# EAGLE board combine (EAGLE 5.10)
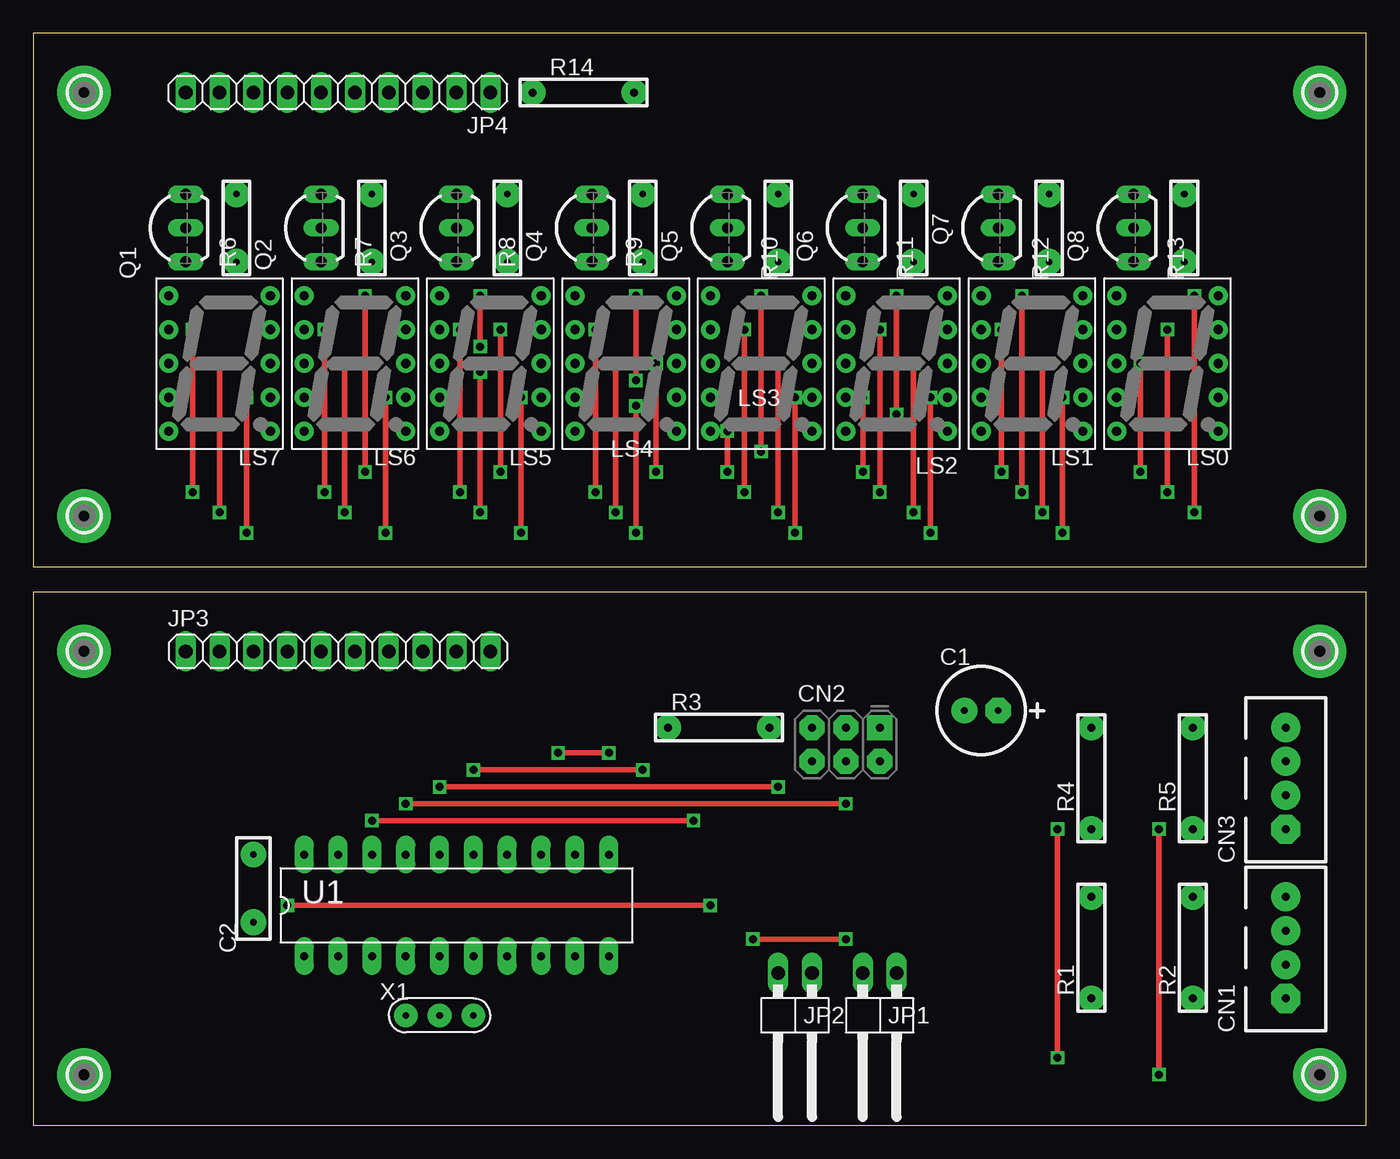
[diagram p0: board, top side]
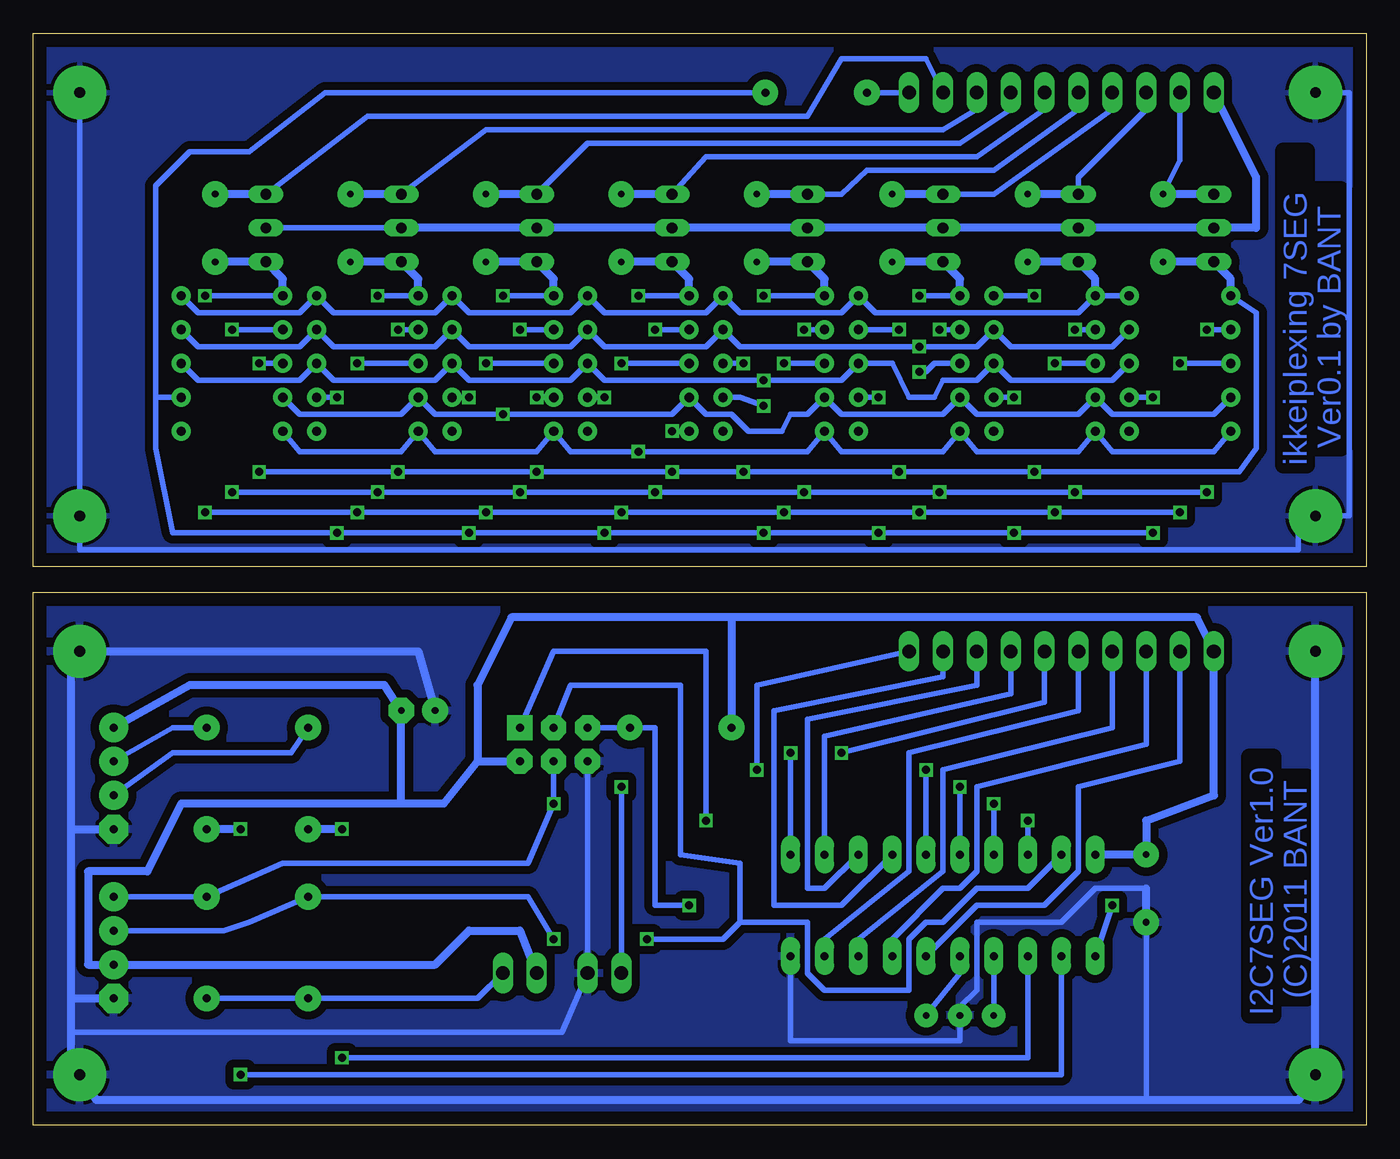
[diagram p1: board, bottom side, seen from below]

Size 100 x 81.91 mm. Coordinates in mm from the lower left corner, seen from the top.
Outline: 0,0 100,0 100,40 0,40 0,0
Outline: 0,41.91 100,41.91 100,81.91 0,81.91 0,41.91
Copper layers (1*16): Top 0.035mm / dielectric 1.5mm / Bottom 0.035mm
Design rules "default": minimum track width 10mil, minimum drill 24mil, track to track 8mil, track to pad 8mil, pad to pad 8mil, via to via 8mil, smd to smd 8mil, copper to edge 40mil, drill to drill 8mil, minimum pad ring 10mil, minimum via ring 8mil, stop-mask expansion 4mil, vias tented up to drill 0mil, thermal gap 10mil

## Footprints (pad centres in the part's own frame; a part is rotated, then mirrored left to right if it is on the bottom)
CCAP_6.5 = drill 0.5 pad 1.93 octagon: + -1.27,0 | drill 0.5 pad 1.93 round: - 1.27,0
CAP_DIP_2 = drill 0.5 pad 1.93 round: 1 -2.54,0; 2 2.54,0
CON_HRS_DIP_4 = drill 0.6 pad 2.184 octagon: 1 -3.81,0 | drill 0.6 pad 2.184 round: 2 -1.27,0; 3 1.27,0; 4 3.81,0
2X3-NS = drill 0.6 pad 1.88 square: 1 -2.54,-1.27 | drill 0.6 pad 1.88 octagon: 2 -2.54,1.27; 3 0,-1.27; 4 0,1.27; 5 2.54,-1.27; 6 2.54,1.27
1X02/90 = drill 1.016 long: 1 -2.54,-3.81; 2 0,-3.81
1X10 = drill 1.016 long: 1 -11.43,0; 2 -8.89,0; 3 -6.35,0; 4 -3.81,0; 5 -1.27,0; 6 1.27,0; 7 3.81,0; 8 6.35,0; 9 8.89,0; 10 11.43,0
7SEG-10 = drill 0.7 pad 1.422 round: 1 -3.81,5.08; 2 -3.81,2.54; 3 -3.81,0; 4 -3.81,-2.54; 5 -3.81,-5.08; 6 3.81,-5.08; 7 3.81,-2.54; 8 3.81,0; 9 3.81,2.54; 10 3.81,5.08
PAD-2.1 = drill 0.8 pad 4 round: B2,1 0,0
TO92 = drill 0.813 long: B 2.54,0; C 0,0; E -2.54,0
R_0.125W_3 = drill 0.6 pad 1.93 round: 1 -3.81,0; 2 3.81,0
R_0.125W_2 = drill 0.5 pad 1.93 round: 1 -2.54,0; 2 2.54,0
DIL20 = drill 0.6 pad 1.422 long: 1 -11.43,-3.81; 2 -8.89,-3.81; 3 -6.35,-3.81; 4 -3.81,-3.81; 5 -1.27,-3.81; 6 1.27,-3.81; 7 3.81,-3.81; 8 6.35,-3.81; 9 8.89,-3.81; 10 11.43,-3.81; 11 11.43,3.81; 12 8.89,3.81; 13 6.35,3.81; 14 3.81,3.81; 15 1.27,3.81; 16 -1.27,3.81; 17 -3.81,3.81; 18 -6.35,3.81; 19 -8.89,3.81; 20 -11.43,3.81
CSTLS = drill 0.5 pad 1.778 round: 1 -2.54,0; 2 0,0; 3 2.54,0

## Placement (x,y rotation side)
C1  10uF  [CCAP_6.5]  71.12,31.11 180 top
C2  0.1uF  [CAP_DIP_2]  16.51,17.78 90 top
CN1  I2C  [CON_HRS_DIP_4]  93.98,13.34 90 top
CN2  AVR-ISP-6NS  [2X3-NS]  60.96,28.57 180 top
CN3  TTL  [CON_HRS_DIP_4]  93.98,26.04 90 top
JP1  [1X02/90]  62.23,7.62 180 top
JP2  [1X02/90]  55.88,7.62 180 top
JP3  [1X10]  22.86,35.56 0 top
JP4  [1X10]  22.86,77.47 180 top
LS0  [7SEG-10]  85.09,57.15 0 top
LS1  [7SEG-10]  74.93,57.15 0 top
LS2  [7SEG-10]  64.77,57.15 0 top
LS3  [7SEG-10]  54.61,57.15 0 top
LS4  [7SEG-10]  44.45,57.15 0 top
LS5  [7SEG-10]  34.29,57.15 0 top
LS6  [7SEG-10]  24.13,57.15 0 top
LS7  [7SEG-10]  13.97,57.15 0 top
MT1  MOUNT-PAD2.1  [PAD-2.1]  96.52,35.56 0 top
MT2  MOUNT-PAD2.1  [PAD-2.1]  96.52,3.81 0 top
MT3  MOUNT-PAD2.1  [PAD-2.1]  3.81,3.81 90 top
MT4  MOUNT-PAD2.1  [PAD-2.1]  3.81,35.56 0 top
MT5  MOUNT-PAD2.1  [PAD-2.1]  3.81,77.47 0 top
MT6  MOUNT-PAD2.1  [PAD-2.1]  3.81,45.72 0 top
MT7  MOUNT-PAD2.1  [PAD-2.1]  96.52,45.72 0 top
MT8  MOUNT-PAD2.1  [PAD-2.1]  96.52,77.47 0 top
Q1  2SC1815  [TO92]  11.43,67.31 90 top
Q2  2SC1815  [TO92]  21.59,67.31 90 top
Q3  2SC1815  [TO92]  31.75,67.31 90 top
Q4  2SC1815  [TO92]  41.91,67.31 90 top
Q5  2SC1815  [TO92]  52.07,67.31 90 top
Q6  2SC1815  [TO92]  62.23,67.31 90 top
Q7  2SC1815  [TO92]  72.39,67.31 90 top
Q8  2SC1815  [TO92]  82.55,67.31 90 top
R1  10K  [R_0.125W_3]  79.38,13.34 270 top
R2  10K  [R_0.125W_3]  87,13.34 270 top
R3  10K  [R_0.125W_3]  51.44,29.84 180 top
R4  1K  [R_0.125W_3]  79.38,26.04 90 top
R5  1K  [R_0.125W_3]  87,26.04 90 top
R6  100  [R_0.125W_2]  15.24,67.31 270 top
R7  100  [R_0.125W_2]  25.4,67.31 270 top
R8  100  [R_0.125W_2]  35.56,67.31 270 top
R9  100  [R_0.125W_2]  45.72,67.31 270 top
R10  100  [R_0.125W_2]  55.88,67.31 270 top
R11  100  [R_0.125W_2]  66.04,67.31 270 top
R12  100  [R_0.125W_2]  76.2,67.31 270 top
R13  100  [R_0.125W_2]  86.36,67.31 270 top
R14  100  [R_0.125W_3]  41.27,77.47 0 top
U1  ATTINY2313  [DIL20]  31.75,16.51 0 top
X1  8MHz  [CSTLS]  30.48,8.26 180 top

## Library data of the parts
C1 C2 CN1 CN3 MT1-MT8 R1-R14 X1 = MyLib
CN2 U1 = atmel
JP1-JP4 = pinheader
LS0 LS1-LS7 = 7seg_led
Q1-Q8 = bant

## Nets
GND: C1.- C2.1 CN1.1 CN2.6 CN3.1 JP2.1 MT1.B2,1 MT2.B2,1 MT3.B2,1 MT4.B2,1 U1.10 X1.2
GND1: MT5.B2,1 MT6.B2,1 MT7.B2,1 MT8.B2,1
LINE2: JP4.9 Q1.B R6.1
LINE3: JP4.8 Q2.B R7.1
LINE4: JP4.7 Q3.B R8.1
LINE5: JP4.6 Q4.B R9.1
LINE6: JP4.5 Q5.B R10.1
LINE7: JP4.4 Q6.B R11.1
LINE8: JP4.3 Q7.B R12.1
LINE9: JP4.2 Q8.B R13.1
LINE10: JP4.1 R14.1
N$1: CN3.2 R4.2
N$2: CN3.3 R5.2
N$3: JP3.2 U1.6
N$4: JP3.3 U1.7
N$5: JP3.4 U1.8
N$6: JP3.5 U1.9
N$7: JP3.6 U1.11
N$8: CN2.5 R3.1 U1.1
N$9: CN1.3 CN2.3 R1.1 U1.19
N$10: CN1.4 CN2.4 R2.1 U1.17
N$11: JP1.1 R1.2 R2.2
N$12: JP3.7 U1.12
N$13: R4.1 U1.3
N$14: R5.1 U1.2
N$15: CN2.1 U1.18
N$16: JP2.2 U1.16
N$17: U1.4 X1.3
N$18: U1.5 X1.1
N$19: JP3.8 U1.13
N$20: JP3.9 U1.14
N$21: JP3.10 U1.15
N$22: LS0.3 LS1.2 LS2.4 LS3.5 LS4.8 LS5.9 LS6.10 LS7.1 Q1.E R6.2
N$23: LS0.2 LS1.1 LS2.2 LS3.2 LS4.2 LS5.2 LS6.2 LS7.2 Q7.E R12.2
N$24: LS0.10 LS1.10 LS2.10 LS3.10 LS4.10 LS5.10 LS6.1 LS7.10 Q2.E R7.2
N$25: LS0.4 LS1.4 LS2.1 LS3.4 LS4.4 LS5.4 LS6.4 LS7.4 Q6.E R11.2
N$26: LS0.5 LS1.5 LS2.5 LS3.1 LS4.5 LS5.5 LS6.5 LS7.5 Q5.E R10.2
N$27: LS0.8 LS1.8 LS2.8 LS3.8 LS4.1 LS5.8 LS6.8 LS7.8 Q4.E R9.2
N$28: LS0.9 LS1.9 LS2.9 LS3.9 LS4.9 LS5.1 LS6.9 LS7.9 Q3.E R8.2
N$32: LS0.7 LS1.7 LS2.7 LS3.7 LS4.7 LS5.7 LS6.7 LS7.7 R14.2
N$34: LS0.1 LS1.3 LS2.3 LS3.3 LS4.3 LS5.3 LS6.3 LS7.3 Q8.E R13.2
VCC: C1.+ C2.2 CN1.2 CN2.2 CN3.4 JP1.2 JP3.1 R3.2 U1.20
VCC1: JP4.10 Q1.C Q2.C Q3.C Q4.C Q5.C Q6.C Q7.C Q8.C

## Tracks (layer width: path | path; a pad name or v marks a point on that pad's centre or on a via)
GND
  Bottom 0.406: CN2.6 JP2.1 60.33,6.99 97.16,6.99 | U1.10 43.18,6.35 30.48,6.35 X1.2 30.48,8.89 29.21,10.16 29.21,15.24 22.86,15.24 20.32,17.78 16.51,17.78 | 97.16,4.45 96.52,4.45 MT2.B2,1 | 16.51,1.91 C2.1
  Bottom 0.61: C2.1 16.51,17.78 | MT2.B2,1 95.25,1.91 16.51,1.91 5.08,1.91 MT3.B2,1 MT4.B2,1 | 97.16,4.45 97.16,6.99 97.16,9.53 | 97.16,9.53 97.16,22.23 | 97.16,22.23 97.16,35.56 MT1.B2,1 71.12,35.56 C1.- | 97.16,9.53 CN1.1 | 97.16,22.23 CN3.1
  pour Bottom (isolate 0.61): 0,39.37 0,0 100.33,0 100.33,40.64 0,40.64
GND1
  Bottom 0.406: MT8.B2,1 MT7.B2,1 96.52,43.18 5.08,43.18 5.08,45.72 MT6.B2,1 1.27,45.72 1.27,77.47 MT5.B2,1
  pour Bottom (isolate 0.61): 0,82.55 0,41.91 100.33,41.91 100.33,82.55
LINE2
  Bottom 0.406: JP4.9 13.97,72.39 R6.1
  Bottom 0.61: Q1.B R6.1
LINE3
  Bottom 0.406: JP4.8 16.51,76.2 21.59,71.12 Q2.B
  Bottom 0.61: Q2.B R7.1
LINE4
  Bottom 0.406: Q3.B 27.94,69.85 19.05,76.2 JP4.7
  Bottom 0.61: Q3.B R8.1
LINE5
  Bottom 0.406: Q4.B 39.37,69.85 37.47,71.63 27.94,71.63 21.59,76.2 JP4.6
  Bottom 0.61: Q4.B R9.1
LINE6
  Bottom 0.406: Q5.B 49.53,72.64 29.21,72.64 24.13,76.2 JP4.5
  Bottom 0.61: Q5.B R10.1
LINE7
  Bottom 0.406: Q6.B 58.42,73.66 30.48,73.66 26.67,76.2 JP4.4
  Bottom 0.61: Q6.B R11.1
LINE8
  Bottom 0.406: Q7.B 66.04,74.68 31.75,74.68 29.21,76.2 JP4.3
  Bottom 0.61: Q7.B R12.1
LINE9
  Bottom 0.406: Q8.B 74.93,75.69 41.91,75.69 39.37,80.01 33.02,80.01 JP4.2
  Bottom 0.61: Q8.B R13.1
LINE10
  Bottom 0.406: JP4.1 R14.1
N$1
  Bottom 0.406: R4.2 80.64,27.94 89.53,27.94 CN3.2
N$2
  Bottom 0.406: R5.2 89.53,29.84 CN3.3
N$3
  Bottom 0.406: U1.6 29.21,16.51 24.13,16.51 21.59,19.05 21.59,25.4 13.97,27.3 JP3.2
N$4
  Bottom 0.406: U1.7 35.56,13.97 31.75,17.78 30.48,17.78 29.21,19.05 29.21,25.4 16.51,28.57 JP3.3
N$5
  Bottom 0.406: U1.8 38.1,13.97 31.75,19.05 31.75,26.67 19.05,29.84 JP3.4
N$6
  Bottom 0.406: U1.9 40.64,13.97 34.29,19.05 34.29,27.94 21.59,31.11 JP3.5
N$7  (via drill 0.6)
  Top 0.406: v39.37,27.94 v43.18,27.94
  Bottom 0.406: JP3.6 24.13,31.75 v39.37,27.94 | v43.18,27.94 U1.11
N$8  (via drill 0.6)
  Top 0.406: v19.05,16.51 v50.8,16.51
  Bottom 0.406: CN2.5 R3.1 53.34,29.84 53.34,16.51 v50.8,16.51 | U1.1 v19.05,16.51
N$9  (via drill 0.6)
  Top 0.406: v53.98,13.97 v60.96,13.97
  Bottom 0.254: CN2.3 60.96,29.21
  Bottom 0.406: CN1.3 85.72,14.61 83.82,15.24 R1.1 62.87,17.14 v60.96,13.97 | U1.19 25.4,17.78 29.21,17.78 31.75,15.24 33.02,15.24 34.29,13.97 34.29,10.16 40.64,10.16 41.91,11.43 41.91,15.24 46.99,15.24 | 46.99,15.24 48.26,13.97 v53.98,13.97 | CN2.3 59.69,33.02 51.44,33.02 51.44,20.32 46.99,19.68 46.99,15.24
N$10  (via drill 0.6)
  Top 0.406: v27.94,24.13 v60.96,24.13
  Bottom 0.406: CN2.4 v60.96,24.13 62.87,19.68 81.28,19.68 R2.1 | R2.1 86.36,17.14 | R2.1 CN1.4 | U1.17 v27.94,24.13
N$11
  Bottom 0.406: JP1.1 66.67,9.53 R1.2 R2.2
N$12
  Bottom 0.406: U1.12 40.64,29.21 26.67,32.38 JP3.7
N$13  (via drill 0.6)
  Top 0.406: v76.83,5.08 v76.83,22.23
  Bottom 0.406: U1.3 25.4,5.08 v76.83,5.08
  Bottom 0.61: v76.83,22.23 R4.1
N$14  (via drill 0.6)
  Top 0.406: v84.45,3.81 v84.45,22.23
  Bottom 0.406: U1.2 22.86,3.81 v84.45,3.81
  Bottom 0.61: v84.45,22.23 R5.1
N$15  (via drill 0.6)
  Top 0.406: v25.4,22.86 v49.53,22.86
  Bottom 0.406: CN2.1 60.96,35.56 49.53,35.56 v49.53,22.86 | U1.18 v25.4,22.86
N$16  (via drill 0.6)
  Top 0.406: v30.48,25.4 v55.88,25.4
  Bottom 0.406: U1.16 v30.48,25.4 | v55.88,25.4 JP2.2
N$17
  Bottom 0.406: X1.3 U1.4
N$18
  Bottom 0.406: X1.1 30.48,11.43 U1.5
N$19
  Bottom 0.406: U1.13 40.64,17.78 41.91,17.78 41.91,30.48 29.21,33.02 JP3.8
N$20
  Bottom 0.406: U1.14 39.37,16.51 44.45,16.51 44.45,31.11 31.75,33.66 JP3.9
N$21  (via drill 0.6)
  Top 0.406: v33.02,26.67 v45.72,26.67
  Bottom 0.406: JP3.10 45.72,33.02 v45.72,26.67 | U1.15 v33.02,26.67
N$22  (via drill 0.6)
  Top 0.406: v83.06,49.02 v83.06,57.15 | v24.89,49.02 v24.89,62.23 | v35.05,49.02 v35.05,59.69 | v46.74,49.02 v46.74,57.15 | v52.07,49.02 v52.07,52.07 | v62.23,49.02 v62.23,54.61 | v72.64,49.02 v72.64,59.69
  Bottom 0.406: v83.06,49.02 v72.64,49.02 v62.23,49.02 v52.07,49.02 v46.74,49.02 v35.05,49.02 v24.89,49.02 9.53,49.02 8.26,50.8 8.26,60.96 LS7.1 | v83.06,57.15 LS0.3 | v24.89,62.23 LS6.10 | v35.05,59.69 LS5.9 | v46.74,57.15 LS4.8 | v52.07,52.07 LS3.5 | v62.23,54.61 LS2.4 | v72.64,59.69 LS1.2
  Bottom 0.61: LS7.1 10.16,63.5 Q1.E R6.2
N$23  (via drill 0.6)
  Top 0.406: v85.09,47.5 v85.09,59.69 | v11.94,47.5 v11.94,59.69 | v21.84,47.5 v21.84,59.69 | v32,47.5 v32,59.69 | v42.16,47.5 v42.16,59.69 | v63.5,47.5 v63.5,59.69 | v74.17,47.5 v74.17,62.23 | v53.34,47.5 v53.34,59.69
  Bottom 0.406: v85.09,59.69 LS0.2 | v11.94,47.5 v21.84,47.5 v32,47.5 v42.16,47.5 v53.34,47.5 v63.5,47.5 v74.17,47.5 v85.09,47.5 | v11.94,59.69 LS7.2 | v21.84,59.69 LS6.2 | v32,59.69 LS5.2 | v42.16,59.69 LS4.2 | v63.5,59.69 LS2.2 | v74.17,62.23 LS1.1 | v53.34,59.69 LS3.2
  Bottom 0.61: LS1.1 71.12,63.5 Q7.E R12.2
N$24
  Bottom 0.406: LS7.10 LS6.1 21.59,60.96 36.83,60.96 LS5.10 39.37,60.96 46.99,60.96 LS4.10 49.53,60.96 57.15,60.96 LS3.10 59.69,60.96 67.31,60.96 LS2.10 69.85,60.96 77.47,60.96 LS1.10 80.01,60.96 87.63,60.96 LS0.10
  Bottom 0.61: LS6.1 20.32,63.5 Q2.E R7.2
N$25  (via drill 0.6)
  Top 0.406: v64.77,53.34 v64.77,62.23
  Bottom 0.406: LS7.4 11.43,53.34 19.05,53.34 LS6.4 21.59,53.34 29.21,53.34 LS5.4 31.75,53.34 39.37,53.34 LS4.4 41.91,53.34 43.18,53.34 43.81,52.07 46.35,52.07 47.62,53.34 49.53,53.34 LS3.4 52.07,53.34 v64.77,53.34 69.85,53.34 LS1.4 72.39,53.34 80.01,53.34 LS0.4 | v64.77,62.23 LS2.1
  Bottom 0.61: LS2.1 60.96,63.5 Q6.E R11.2
N$26  (via drill 0.6)
  Top 0.406: v54.61,50.55 v54.61,62.23
  Bottom 0.406: LS7.5 11.43,50.55 19.05,50.55 LS6.5 21.59,50.55 29.21,50.55 LS5.5 31.75,50.55 39.37,50.55 LS4.5 41.91,50.55 v54.61,50.55 59.69,50.55 LS2.5 62.23,50.55 69.85,50.55 LS1.5 72.39,50.55 80.01,50.55 LS0.5 | v54.61,62.23 LS3.1
  Bottom 0.61: LS3.1 50.8,63.5 Q5.E R10.2
N$27  (via drill 0.6)
  Top 0.406: v45.21,55.88 v45.21,62.23
  Bottom 0.406: LS7.8 19.05,55.88 26.67,55.88 LS6.8 29.21,55.88 31.75,55.88 32.38,54.61 34.29,54.61 35.56,57.15 LS5.8 39.37,55.88 v45.21,55.88 57.15,55.88 LS3.8 59.69,55.88 67.31,55.88 LS2.8 69.85,55.88 77.47,55.88 LS1.8 80.01,55.88 87.63,55.88 LS0.8 | v45.21,62.23 LS4.1
  Bottom 0.61: LS4.1 40.64,63.5 Q4.E R9.2
N$28  (via drill 0.6)
  Top 0.406: v33.53,58.42 v33.53,62.23
  Bottom 0.406: LS7.9 19.05,58.42 26.67,58.42 LS6.9 29.21,58.42 v33.53,58.42 46.99,58.42 LS4.9 49.53,58.42 57.15,58.42 LS3.9 59.69,58.42 67.31,58.42 LS2.9 69.85,58.42 77.47,58.42 LS1.9 80.01,58.42 87.63,58.42 LS0.9 | v33.53,62.23 LS5.1
  Bottom 0.61: LS5.1 30.48,63.5 Q3.E R8.2
N$32  (via drill 0.6)
  Top 0.406: v16,44.45 v16,54.61 | v26.42,44.45 v26.42,54.61 | v36.58,44.45 v36.58,54.61 | v45.21,44.45 v45.21,53.98 | v77.22,44.45 v77.22,54.61 | v67.31,44.45 v67.31,54.61 | v57.15,44.45 v57.15,54.61
  Bottom 0.406: v16,54.61 LS7.7 | v16,44.45 v26.42,44.45 v36.58,44.45 v45.21,44.45 v57.15,44.45 v67.31,44.45 v77.22,44.45 89.53,44.45 90.81,50.8 90.81,54.61 | 90.81,54.61 LS0.7 | v26.42,54.61 LS6.7 | v36.58,54.61 LS5.7 | v45.21,53.98 46.99,54.61 LS4.7 | v77.22,54.61 LS1.7 | v67.31,54.61 LS2.7 | v57.15,54.61 LS3.7 | R14.2 78.11,77.47 83.82,73.03 88.27,73.03 90.81,70.48 90.81,54.61
N$34  (via drill 0.6)
  Top 0.406: v13.97,45.97 v13.97,57.15 | v87.12,45.97 v87.12,62.23 | v75.69,45.97 v75.69,57.15 | v66.04,45.97 v66.04,57.15 | v55.88,45.97 v55.88,57.15 | v43.69,45.97 v43.69,57.15 | v33.53,45.97 v33.53,56.52 | v23.37,45.97 v23.37,57.15
  Bottom 0.406: v13.97,57.15 LS7.3 | v13.97,45.97 v23.37,45.97 v33.53,45.97 v43.69,45.97 v55.88,45.97 v66.04,45.97 v75.69,45.97 v87.12,45.97 | v87.12,62.23 LS0.1 | v75.69,57.15 LS1.3 | v66.04,57.15 LS2.3 | v55.88,57.15 LS3.3 | v43.69,57.15 LS4.3 | v23.37,57.15 LS6.3 | v33.53,56.52 33.02,56.52 32.38,57.15 LS5.3
  Bottom 0.61: LS0.1 81.28,63.5 Q8.E R13.2
VCC
  Bottom 0.406: CN1.2 94.61,12.06
  Bottom 0.61: JP1.2 63.5,14.61 67.31,14.61 69.85,12.06 CN1.2 95.89,12.06 95.89,19.05 91.44,19.05 88.9,24.13 72.39,24.13 | 66.67,27.3 CN2.2 | 47.62,38.1 12.7,38.1 JP3.1 11.43,24.77 16.51,22.86 C2.2 U1.20 | 47.62,38.1 R3.2 | 66.67,27.3 69.22,24.13 72.39,24.13 | CN3.4 88.27,33.02 73.66,33.02 C1.+ 72.39,24.13 | 47.62,38.1 64.14,38.1 66.67,33.02 66.67,27.3
VCC1
  Bottom 0.406: Q7.C Q8.C
  Bottom 0.61: Q7.C Q6.C Q5.C Q4.C Q3.C Q2.C Q1.C 8.26,67.31 8.26,71.12 JP4.10

## Text on the board
Bottom: Ver0.1 by BANT | ikkeiplexing 7SEG | (C)2011 BANT | I2C7SEG Ver1.0